# Altium PCB ArcadESP.PcbDoc
Units mil, origin at the board's own origin, x right, y up, seen from the top; angles counter-clockwise.
Board outline 3937.01 x 1968.5 mil, 2 copper layers (Top, Bottom); 118 components, 74 nets, 416 pads, 97 vias.
Unrouted connection lines stored in the file: 4.
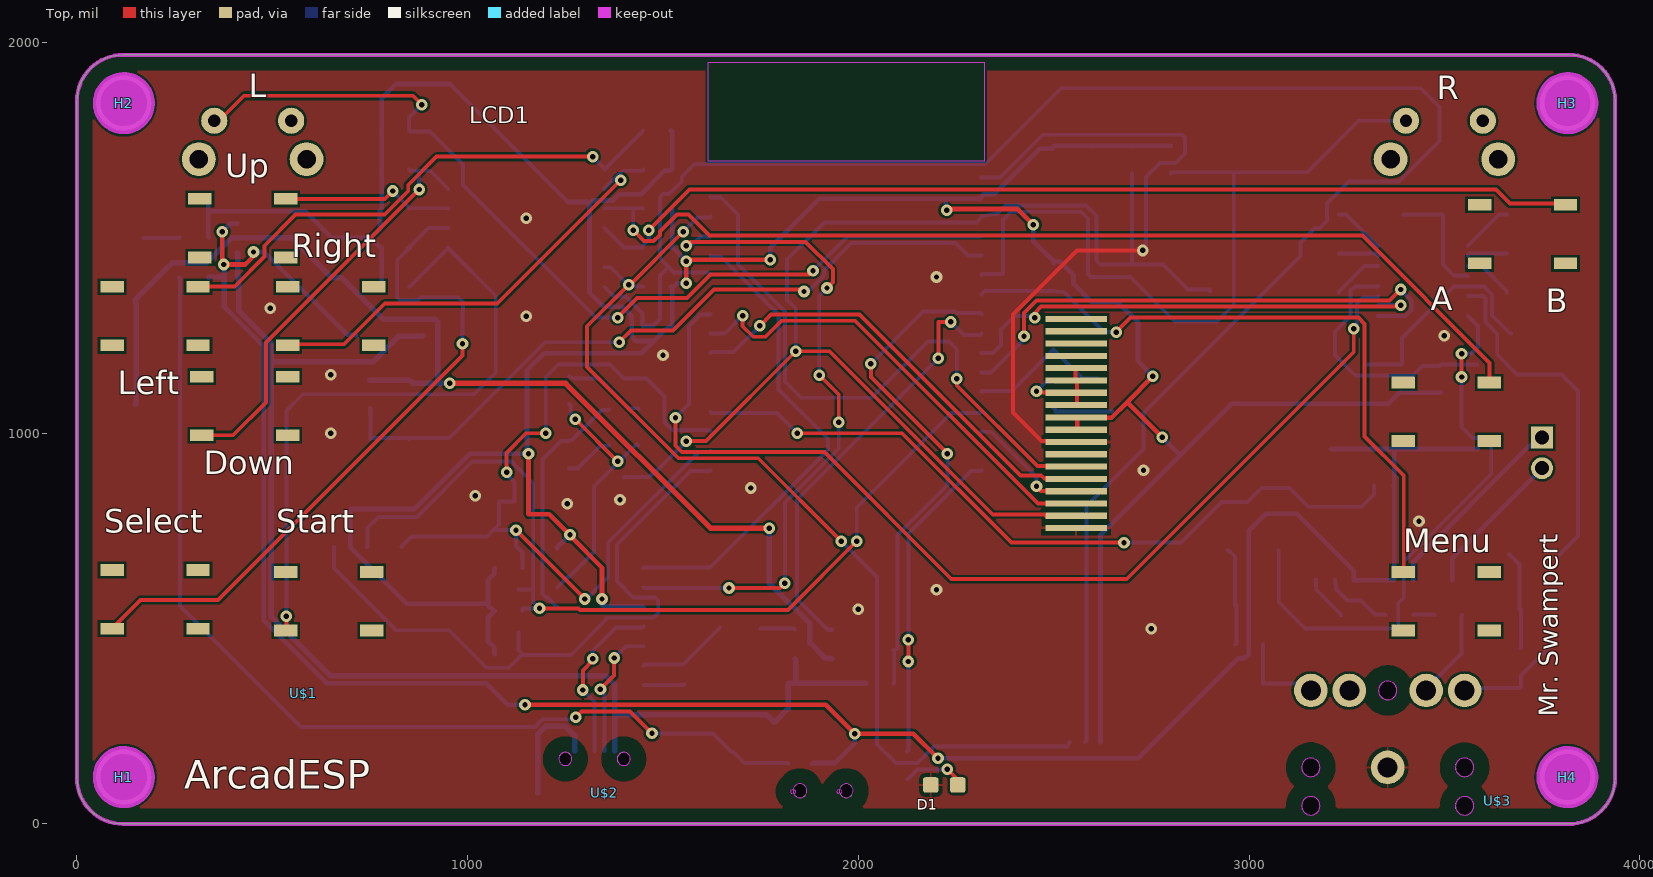
[diagram p0: Top view]
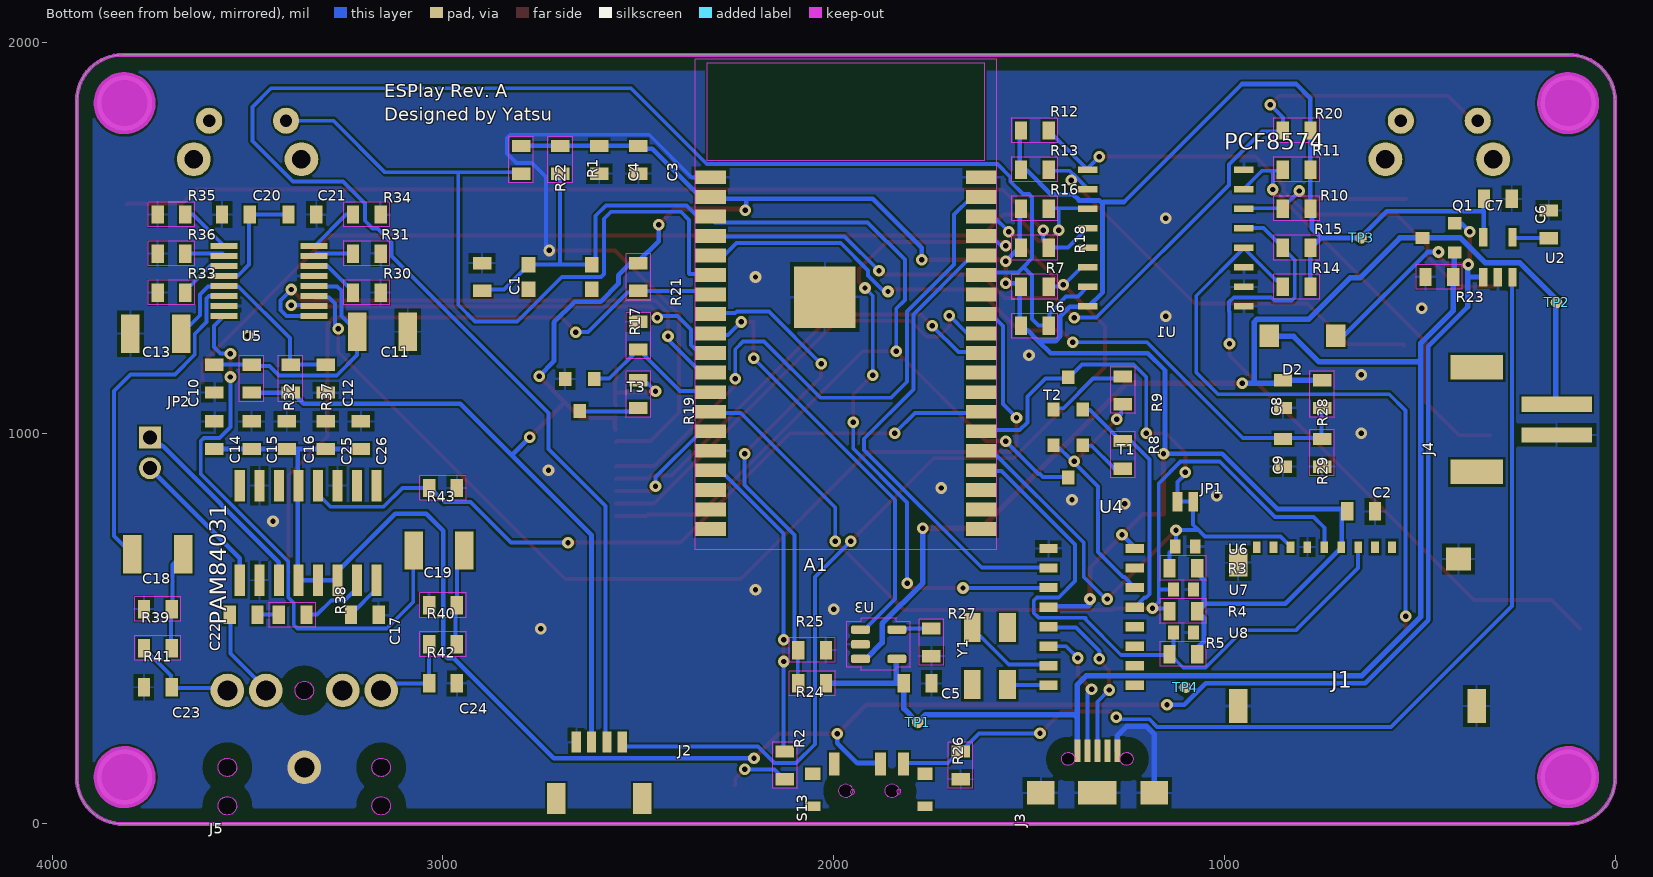
[diagram p1: Bottom view, seen from below]

## Layer stack, top to bottom
Top Solder: solder mask 0.4, Solder Resist, Dk 3.5
Top: signal copper 1.378
Dielectric 1: dielectric 12.6, FR-4, Dk 4.8
Bottom: signal copper 1.378
Bottom Solder: solder mask 0.4, Solder Resist, Dk 3.5

## Board outline
107.82,1968.06 ccw(c118.12,1850.39) 0,1850.39 0,118.11 ccw(c118.11,118.11) 118.11,0 3818.9,0 3829.19,0.45 ccw(c3818.91,118.12) 3936.58,107.81 3937.01,115.79 3937.01,1852.72 3936.46,1862.91 ccw(c3820.06,1851.56) 3818.9,1968.5 118.11,1968.5
cut-out: 3551.85,22.95 ccw(c3551.85,46.57) 3575.47,46.57 ccw(c3551.85,46.57) 3551.85,70.19 ccw(c3551.85,46.57) 3528.23,46.57 ccw(c3551.85,46.57)
cut-out: 3551.85,121.38 ccw(c3551.85,145) 3575.47,145 ccw(c3551.85,145) 3551.85,168.62 ccw(c3551.85,145) 3528.23,145 ccw(c3551.85,145)
cut-out: 3158.15,22.95 ccw(c3158.15,46.57) 3181.77,46.57 ccw(c3158.15,46.57) 3158.15,70.19 ccw(c3158.15,46.57) 3134.53,46.57 ccw(c3158.15,46.57)
cut-out: 3355,318.23 ccw(c3355,341.85) 3378.62,341.85 ccw(c3355,341.85) 3355,365.47 ccw(c3355,341.85) 3331.38,341.85 ccw(c3355,341.85)
cut-out: 3158.15,121.38 ccw(c3158.15,145) 3181.77,145 ccw(c3158.15,145) 3158.15,168.62 ccw(c3158.15,145) 3134.53,145 ccw(c3158.15,145)
cut-out: 1850.94,67.28 ccw(c1850.94,85) 1868.65,85 ccw(c1850.94,85) 1850.94,102.72 ccw(c1850.94,85) 1833.22,85 ccw(c1850.94,85)
cut-out: 1969.06,67.28 ccw(c1969.06,85) 1986.78,85 ccw(c1969.06,85) 1969.06,102.72 ccw(c1969.06,85) 1951.35,85 ccw(c1969.06,85)
cut-out: 1250.2,149.88 ccw(c1250.2,166.61) 1266.93,166.61 ccw(c1250.2,166.61) 1250.2,183.34 ccw(c1250.2,166.61) 1233.47,166.61 ccw(c1250.2,166.61)
cut-out: 1399.8,149.88 ccw(c1399.8,166.61) 1416.53,166.61 ccw(c1399.8,166.61) 1399.8,183.34 ccw(c1399.8,166.61) 1383.07,166.61 ccw(c1399.8,166.61)
cut-out: 3553.18,22.95 3555.82,23.25 ccw(c3551.85,46.58) 3550.52,70.2 ccw(c3551.85,46.58)
cut-out: 3553.18,121.38 3555.82,121.67 ccw(c3551.85,145) 3550.52,168.62 ccw(c3551.85,145)
cut-out: 3159.48,22.95 3162.11,23.25 ccw(c3158.15,46.58) 3156.82,70.2 ccw(c3158.15,46.58)
cut-out: 3356.33,318.23 3358.96,318.53 ccw(c3355,341.85) 3353.67,365.47 ccw(c3355,341.85)
cut-out: 3159.48,121.38 3162.11,121.67 ccw(c3158.15,145) 3156.82,168.62 ccw(c3158.15,145)
cut-out: 1400.9,149.88 1403.07,150.17 ccw(c1399.8,166.62) 1398.7,183.35 ccw(c1399.8,166.62)
cut-out: 1251.3,149.88 1253.47,150.17 ccw(c1250.2,166.62) 1249.1,183.35 ccw(c1250.2,166.62)
cut-out: 1954.64,88.13 1956.71,84.54 1957.01,82.24 1955.93,78.24 1952.34,76.17 1948.34,77.25 1946.27,80.84 1945.97,83.14 1947.05,87.14 1950.64,89.21
cut-out: 1836.53,88.13 1838.6,84.54 1838.9,82.24 1837.82,78.24 1834.23,76.17 1830.23,77.25 1828.16,80.84 1827.86,83.14 1828.94,87.14 1832.53,89.21

## Design rules (kind name [scope] priority, off if disabled: settings)
BoardOutlineClearance mdCopperDimension [All] p1: gap=10 ignorepadtopadclearanceinfootprint=FALSE except(0: Arc-SplitContinuation Track-SplitContinuation SMDPad-SplitContinuation THPad-SplitContinuation Via-SplitContinuation Fill-SplitContinuation Poly-SplitContinuation Region-SplitContinuation Text-SplitContinuation; 40: Poly-OutlineEdge Poly-CavityEdge Poly-CutoutEdge Poly-SplitBarrior)
Clearance "Clearance (Same Net)" [All] p1: gap=6 ignorepadtopadclearanceinfootprint=FALSE
Clearance [All] p2: gap=6 ignorepadtopadclearanceinfootprint=FALSE
HoleSize HoleSize_For_NetClass_3V3 [InNetClass('3V3')] p1: absolutevalues=TRUE maxlimit=0 minlimit=0 maxpercent=80.000 minpercent=20.000
HoleSize HoleSize_For_NetClass_VBUS [InNetClass('VBUS')] p2: absolutevalues=TRUE maxlimit=0 minlimit=0 maxpercent=80.000 minpercent=20.000
HoleSize [All] p3: absolutevalues=TRUE maxlimit=100000 minlimit=13.78 maxpercent=80.000 minpercent=20.000
HoleToHoleClearance mdDrill [All] p1: gap=6 allowstackedmicrovias=TRUE
MinimumSolderMaskSliver [All] p1 off: minsoldermaskwidth=10
PasteMaskExpansion Expansion_SMDPaste_OFF [InPadClass('SMDPaste_OFF')] p1: expansion=0
PasteMaskExpansion mlMinCreamFrame [All] p2: expansion=0
PolygonConnect PolygonConnect_For_PolygonThermal_ON_Width60000_Gap100000 [InPolygonClass('PolygonThermal_ON_Width60000_Gap100000') vs Not IsVia] p1: connectstyle=Relief reliefconductorwidth=6 reliefentries=4 polygonreliefangle="90 Angle" airgapwidth=10
PolygonConnect ThermalVias [IsVia] p2: connectstyle=Direct reliefconductorwidth=10 reliefentries=4 polygonreliefangle="90 Angle" airgapwidth=10
PolygonConnect [All] p3: connectstyle=Relief reliefconductorwidth=10 reliefentries=4 polygonreliefangle="90 Angle" airgapwidth=10
RoutingVias [All] p1: holewidth=13.78 width=29.78 viastyle="Through Hole" minholewidth=13.78 minwidth=29.78 maxholewidth=100 maxwidth=100
SolderMaskExpansion Expansion_SMDSolder_OFF [InPadClass('SMDSolder_OFF')] p1: expansion=0 istentingtop=FALSE
SolderMaskExpansion mlMinStopFrame [All] p2: expansion=4 istentingtop=FALSE
Width Width_For_NetClass_3V3 [InNetClass('3V3')] p1: maxlimit=24 minlimit=10 preferedwidth=12
Width Width_For_NetClass_VBUS [InNetClass('VBUS')] p2: maxlimit=28 minlimit=10 preferedwidth=14
Width [All] p3: maxlimit=10 minlimit=6 preferedwidth=6
26 further rules are at their usual default settings.

## Classes and differential pairs
polygon class PolygonThermal_ON_Width60000_Gap100000: Polygon_1_Net_GND Polygon_2_Net_GND
pad class SMDSolder_OFF: J3-SHIELD1 J3-SHIELD2 J3-SHIELD3
pad class SMDPaste_OFF: A1-39 J3-SHIELD1 J3-SHIELD2 J3-SHIELD3 JP1-1 JP1-2 TP1-P$1 TP2-P$1 TP3-P$1 TP4-P$1
net class 3V3: 3.3V SPK+ SPK- VIN
net class VBUS: V_BATT V_USB

## Components (designator, comment, footprint, x,y, rotation, side; value= is the part's Value field where it differs from the comment)
A1 "ESP32-WROVER-I" XCVR_ESP32-WROVER-I 1968.5,1330 r180 bottom
C1 "100nF" 0805#1 2900,1400 r90 bottom
C2 "10uF" 0805#1 650,800 r180 bottom
C3 "2.2uF" 0805#1 2500,1700 r270 bottom
C4 "100nF" 0805#1 2600,1700 r270 bottom
C5 "" 0805#1 1785,360 r0 bottom
C6 "470pF" 0805#1 170,1535 r90 bottom
C7 "10uF" 0805#1 300,1600 r180 bottom
C8 "100nF" 0805#1 850,1100 r270 bottom
C9 "100nF" 0805#1 850,950 r270 bottom
C10 "" 0805#1 3585,1140 r90 bottom
C11 "47uF" EIA3528 3155,1260 r0 bottom
C12 "" 0805#1 3300,1140 r90 bottom
C13 "47uF" EIA3528 3735,1255 r180 bottom
C14 "" 0805#1 3585,995 r270 bottom
C15 "" 0805#1 3490,995 r270 bottom
C16 "" 0805#1 3400,995 r270 bottom
C17 "" 0805#1 3200,535 r0 bottom
C18 "47uF" EIA3528 3730,690 r0 bottom
C19 "47uF" EIA3528 3010,700 r0 bottom
C20 "" 0805#1 3530,1560 r180 bottom
C21 "" 0805#1 3360,1560 r0 bottom
C22 "" 0805#1 3510,535 r0 bottom
C23 "" 0805#1 3730,350 r180 bottom
C24 "" 0805#1 3000,360 r0 bottom
C25 "" 0805#1 3300,995 r270 bottom
C26 "" 0805#1 3210,995 r270 bottom
D1 "BLUE" LED-0603 2220,100 r180 top
D2 "1A/40V/500mV" SMA-DIODE 800,1250 r180 bottom
H1 "" MICROBUILDER_MOUNTINGHOLE_3.0_PLATEDTHIN 120,120 r0 top
H2 "" MICROBUILDER_MOUNTINGHOLE_3.0_PLATEDTHIN 120,1845 r0 top
H3 "" MICROBUILDER_MOUNTINGHOLE_3.0_PLATEDTHIN 3815,1845 r0 top
H4 "" MICROBUILDER_MOUNTINGHOLE_3.0_PLATEDTHIN 3815,120 r0 top
J1 "MICROSD-PUSH-OUT" MICROSD-PUSH-OUT 950,700 r180 bottom
J2 "" 1X04_1MM_RA 2600,210 r180 bottom
J3 "" USB-B-MICRO-SMD 1325,80 r90 bottom
J4 "" JST-2-SMD 295,1035 r90 bottom
J5 "AUDIO_JACK_3.5MM_PTH" AUDIO-JACK 3355,145 r90 bottom
JP1 "JP Bootstrap" SMT-JUMPER_2_NC_TRACE_NO-SILK 1100,825 r0 bottom
JP2 "" 1X02M 3750,950 r270 bottom
LCD1 "" ILI9341-2.4 2030,1025 r180 top
PAM84031 "PAM8403" SOP-16 3345,745 r180 bottom
Q1 "1.1A/60V/600mΩ" SOT23-3 450,1500 r90 bottom
R1 "10K" 0805#2 2700,1700 r90 bottom
R2 "2K2" 0805#2 2125,150 r90 bottom
R3 "10K" 0805#2 1105,655 r0 bottom
R4 "10K" 0805#2 1105,545 r0 bottom
R5 "10K" 0805#2 1105,435 r0 bottom
R6 "4K7" 0805#2 1485,1275 r180 bottom
R7 "4K7" 0805#2 1485,1375 r180 bottom
R8 "10K" 0805#2 1260,945 r90 bottom
R9 "10K" 0805#2 1260,1110 r270 bottom
R10 "10K" 0805#2 815,1575 r0 bottom
R11 "10K" 0805#2 815,1675 r0 bottom
R12 "10K" 0805#2 1485,1775 r180 bottom
R13 "10K" 0805#2 1485,1675 r180 bottom
R14 "10K" 0805#2 815,1375 r0 bottom
R15 "10K" 0805#2 815,1475 r0 bottom
R16 "10K" 0805#2 1485,1575 r180 bottom
R17 "100K" 0805#2 2500,1250 r90 bottom
R18 "10K" 0805#2 1485,1475 r180 bottom
R19 "10" 0805#2 2500,1100 r270 bottom
R20 "10K" 0805#2 815,1775 r0 bottom
R21 "10K" 0805#2 2500,1400 r270 bottom
R22 "10K" 0805#2 2800,1700 r270 bottom
R23 "10K" 0805#2 450,1400 r180 bottom
R24 "47K" 0805#2 2055,360 r0 bottom
R25 "47K" 0805#2 2055,445 r0 bottom
R26 "100K" 0805#2 1675,150 r90 bottom
R27 "1.65K" 0805#2 1750,465 r90 bottom
R28 "470K" 0805#2 750,1100 r270 bottom
R29 "470K" 0805#2 750,950 r270 bottom
R30 "10K" 0805#2 3195,1360 r0 bottom
R31 "10K" 0805#2 3195,1460 r0 bottom
R32 "1" 0805#2 3490,1140 r270 bottom
R33 "10K" 0805#2 3695,1360 r180 bottom
R34 "10K" 0805#2 3195,1560 r0 bottom
R35 "10K" 0805#2 3695,1560 r180 bottom
R36 "10K" 0805#2 3695,1460 r180 bottom
R37 "1" 0805#2 3390,1140 r270 bottom
R38 "10K" 0805#2 3385,535 r180 bottom
R39 "220K" 0805#2 3730,550 r180 bottom
R40 "220K" 0805#2 3000,560 r180 bottom
R41 "100" 0805#2 3730,450 r0 bottom
R42 "100" 0805#2 3000,460 r0 bottom
R43 "100K" 0805#2 3000,860 r0 bottom
S13 "" SWITCH_SPST_SMD_A 1910,85 r0 bottom
T1 "600mA/40V" SOT23-3 1400,930 r0 bottom
T2 "600mA/40V" SOT23-3 1400,1100 r180 bottom
T3 "600mA/40V" SOT23-3 2650,1100 r0 bottom
TP1 "" PAD.03X.03 1785,260 r180 bottom
TP2 "" PAD.03X.03 150,1335 r180 bottom
TP3 "" PAD.03X.03 650,1500 r180 bottom
TP4 "" PAD.03X.03 1100,350 r180 bottom
U1 "PCF8574" SO16 1150,1500 r0 bottom
U2 "MIC5219 3.3V" SOT23-5 300,1450 r180 bottom
U3 "LTC4054LES5-4.2#TRPBF" SOT95P280X100-5N 1885,460 r180 bottom
U4 "CH340G" SO016 1340,530 r270 bottom
U5 "UDA1334ATS" MICROBUILDER_SSOP16_4.4MM 3445,1390 r90 bottom
U6 "ESD0402" ESD0402 1100,710 r180 bottom
U7 "ESD0402" ESD0402 1104.41,600 r180 bottom
U8 "ESD0402" ESD0402 1104.41,490 r180 bottom
U$1 "" OSHW-LOGO-M 580,335 r0 top
U$2 "" USB_LOGO 1350,80 r180 top
U$3 "" HEADPHONE_LOGO 3635,60 r0 top
Y1 "12Mhz" CRYSTAL-SMD-5X3.2-4PAD 1600,430 r90 bottom
? "R" TACTILE_SWITCH_PTH_RIGHT_ANGLE_KIT 3500,1800 r0 bottom
? "L" TACTILE_SWITCH_PTH_RIGHT_ANGLE_KIT 450,1800 r0 bottom
? "" TACTILE_SWITCH_SMD_5.2MM 3505,570 r0 top
? "" TACTILE_SWITCH_SMD_5.2MM 3700,1510 r180 top
? "" TACTILE_SWITCH_SMD_5.2MM 3505,1055 r180 top
? "" TACTILE_SWITCH_SMD_5.2MM 200,575 r0 top
? "" TACTILE_SWITCH_SMD_5.2MM 645,570 r0 top
? "" TACTILE_SWITCH_SMD_5.2MM 650,1300 r0 top
? "" TACTILE_SWITCH_SMD_5.2MM 200,1300 r180 top
? "" TACTILE_SWITCH_SMD_5.2MM 430,1070 r0 top
? "" TACTILE_SWITCH_SMD_5.2MM 425,1525 r180 top
? "RST" TACTILE_SWITCH_SMD_4.6X2.8MM 2700,1400 r180 bottom

## Footprints (in the part's own frame and the unit in brackets; to place one, negate y for a bottom-side part, rotate by r counter-clockwise, add the part's x,y. Pads: shape width x height; smd on the part's side, far side on the other; paste and mask are expansions set on the pad)
1X02M [mil] "1X02M"
  rect 56x56 / inner round 51.74 / far side rect 56x56 hole 36: 1(-39.37,0)
  round 56 hole 36: 2(39.37,0)
  body extent -65,-28 68,28, height 50
1X04_1MM_RA [mm] "1X04_1MM_RA"
  rect 0.6x1.35 smd: 1(-1.5,0) 2(-0.5,0) 3(0.5,0) 4(1.5,0)
  rect 1.2x2 smd: NC1(2.8,-3.675) NC2(-2.8,-3.675)
  body extent -3.4,-4.68 3.4,0.68, height 1.27
0805#1 [mil] "0805"
  rect 31.5x47.24 smd: 1(-35.43,0) 2(35.43,0)
  body extent -51,-24 51,24, height 50
0805#2 [mil] "0805"
  rect 31.5x47.24 smd: 1(-35.43,0) 2(35.43,0)
  Top keep-out lines w2: -59.06,-31.5 -59.06,31.5 59.06,31.5 59.06,-31.5 -59.06,-31.5
  body extent -60,-33 60,33, height 150
AUDIO-JACK [mil] "AUDIO-JACK"
  round 86 hole 51.18: RING(196.85,196.85) RSH(196.85,98.43) SLEEVE(0,0) TIP(196.85,-196.85) TSH(196.85,-98.43)
  body extent -43,-240 240,240, height 50
CRYSTAL-SMD-5X3.2-4PAD [mil] "CRYSTAL-SMD-5X3.2-4PAD"
  rect 74.8x43.31 smd: 1(-72.83,-45.28) 2(72.83,-45.28) 3(72.83,45.28) 4(-72.83,45.28)
  body extent -110,-67 110,67, height 50
EIA3528 [mm] "EIA3528"
  rect 1.2x2.5 smd: A(1.65,0) C(-1.65,0)
  body extent -2.25,-1.25 2.25,1.25, height 1.27
ESD0402 [mm] "ESD0402"
  rect 0.7x0.9 smd: 1(-0.65,0) 2(0.65,0)
  body extent -1,-0.45 1,0.45, height 1.27
HEADPHONE_LOGO [mil] "HEADPHONE_LOGO"
ILI9341-2.4 [mm] "ILI9341-2.4"
  rect 4x0.4 smd: P$1(-13.4,6.8) P$2(-13.4,6) P$3(-13.4,5.2) P$4(-13.4,4.4) P$5(-13.4,3.6) P$6(-13.4,2.8) P$7(-13.4,2) P$8(-13.4,1.2) P$9(-13.4,0.4) P$10(-13.4,-0.4) P$11(-13.4,-1.2) P$12(-13.4,-2) P$13(-13.4,-2.8) P$14(-13.4,-3.6) P$15(-13.4,-4.4) P$16(-13.4,-5.2) P$17(-13.4,-6) P$18(-13.4,-6.8)
  body extent -15.4,-7 -11.4,7, height 1.27
JST-2-SMD [mm] "JST-2-SMD"
  rect 1x4.6 smd: 1(-1,-3.7) 2(1,-3.7)
  rect 1.6x3.4 smd: NC1(-3.4,1.5) NC2(3.4,1.5)
  body extent -4.2,-6 4.2,3.2, height 1.27
LED-0603 [mm] "LED-0603"
  rrect30% 1x1 smd: A(-0.877,0) C(0.877,0)
  body extent -1.39,-0.54 1.39,0.54, height 3.81
MICROBUILDER_MOUNTINGHOLE_3.0_PLATEDTHIN [mm] "MICROBUILDER_MOUNTINGHOLE_3.0_PLATEDTHIN"
  round 3.6 hole 3: P$1(0,0)
  Top keep-out circle w2.032: c0,0 r1
  Top keep-out circle w2.032: c0,0 r1
  Top keep-out circle w2.032: c0,0 r1
  Bottom keep-out circle w2.032: c0,0 r1
  Bottom keep-out circle w2.032: c0,0 r1
  body extent -2.03,-2.03 2.03,2.03, height 3.81
MICROBUILDER_SSOP16_4.4MM [mm] "MICROBUILDER_SSOP16_4.4MM"
  rect 0.4x1.75 smd: 1(-2.275,-2.92) 2(-1.625,-2.92) 3(-0.975,-2.92) 4(-0.325,-2.92) 5(0.325,-2.92) 6(0.975,-2.92) 7(1.625,-2.92) 8(2.275,-2.92) 9(2.275,2.92) 10(1.625,2.92) 11(0.975,2.92) 12(0.325,2.92) 13(-0.325,2.92) 14(-0.975,2.92) 15(-1.625,2.92) 16(-2.275,2.92)
  body extent -2.48,-3.8 2.48,3.8, height 1.27
MICROSD-PUSH-OUT [mm] "MICROSD-PUSH-OUT"
  rect 0.5x0.75 smd: 1(9.625,0.225) 2(8.525,0.225) 3(7.425,0.225) 4(6.325,0.225) 5(5.225,0.225) 6(4.125,0.225) 7(3.025,0.225) 8(1.925,0.225) CD(0.825,0.225)
  rect 1.2x1.8 smd: G1(-0.375,-0.8)
  rect 1.2x2.2 smd: G2(-0.375,-10.1) G4(15.125,-10.1)
  rect 1.6x1.5 smd: G3(13.95,-0.55)
  body extent -0.97,-11.2 15.72,0.6, height 1.27
OSHW-LOGO-M [mil] "OSHW-LOGO-M"
PAD.03X.03 [mil] "PAD.03X.03"
  rrect100% 30x30 smd paste+0: P$1(0,0)
  body extent -15,-15 15,15, height 50
SMA-DIODE [mil] "SMA-DIODE"
  rect 50x57.87 smd: A(-84.65,0) C(84.65,0)
  body extent -110,-29 110,29, height 50
SMT-JUMPER_2_NC_TRACE_NO-SILK [mil] "SMT-JUMPER_2_NC_TRACE_NO-SILK"
  rect 25x50 smd paste+0: 1(-20,0) 2(20,0)
  Top lines w10: -20,0 20,0
  body extent -32,-25 32,25, height 150
SO16 [mil] "SO16"
  rect 50x16.5 smd: 1(-200,175) 2(-200,125) 3(-200,75) 4(-200,25) 5(-200,-25) 6(-200,-75) 7(-200,-125) 8(-200,-175) 9(200,-175) 10(200,-125) 11(200,-75) 12(200,-25) 13(200,25) 14(200,75) 15(200,125) 16(200,175)
  body extent -225,-183 225,183, height 50
SO016 [mil] "SO016"
  rect 23.62x47.24 smd: 1(-175,-110.24) 2(-125,-110.24) 3(-75,-110.24) 4(-25,-110.24) 5(25,-110.24) 6(75,-110.24) 7(125,-110.24) 8(175,-110.24) 9(175,110.24) 10(125,110.24) 11(75,110.24) 12(25,110.24) 13(-25,110.24) 14(-75,110.24) 15(-125,110.24) 16(-175,110.24)
  body extent -187,-134 187,134, height 50
SOP-16 [mil] "SOP-16"
  rect 26x80 smd: 1(-175,-121) 2(-125,-121) 3(-75,-121) 4(-25,-121) 5(25,-121) 6(75,-121) 7(125,-121) 8(175,-121) 9(175,121) 10(125,121) 11(75,121) 12(25,121) 13(-25,121) 14(-75,121) 15(-125,121) 16(-175,121)
  body extent -188,-161 188,161, height 50
SOT23-3 [mil] "SOT23-3"
  rect 31.5x35.43 smd: 1(-37.4,-39.37) 2(37.4,-39.37) 3(0,43.31)
  body extent -53,-57 53,61, height 50
SOT23-5 [mil] "SOT23-5"
  rect 21.65x47.24 smd: 1(-37.4,-51.19) 2(0,-51.19) 3(37.4,-51.19) 4(37.4,51.19) 5(-37.4,51.19)
  body extent -48,-75 48,75, height 50
SOT95P280X100-5N [mil] "SOT95P280X100-5N"
  rrect50% 48.82x21.65 smd: 1(-46.65,37.4) 2(-46.65,0) 3(-46.65,-37.4) 4(46.65,-37.4) 5(46.65,37.4)
  Top keep-out lines w1.97: 81.1,-58.27 44.49,-58.27 44.49,-66.93 -44.49,-66.93 -44.49,-58.27 -81.1,-58.27 -81.1,58.27 -44.49,58.27 -44.49,66.93 44.49,66.93 44.49,58.27 81.1,58.27 81.1,-58.27
  body extent -82,-68 82,68, height 150
SWITCH_SPST_SMD_A [mm] "SWITCH_SPST_SMD_A"
  rect 0.7x1.5 smd: 1(-2.25,-1.75) 2(-0.75,-1.75) 3(2.25,-1.75)
  rect 1x0.6 smd: GND1(-3.65,1) GND3(3.65,1)
  rect 1x0.8 smd: GND2(-3.65,-1.1) GND4(3.65,-1.1)
  body extent -4.15,-2.5 4.15,1.3, height 1.27
TACTILE_SWITCH_PTH_RIGHT_ANGLE_KIT [mil] "TACTILE_SWITCH_PTH_RIGHT_ANGLE_KIT"
  round 66.93 hole 31.5: 1(-98.43,0) 2(98.43,0)
  round 86.61 hole 47.24: ANCHOR1(-137.8,98.43) ANCHOR2(137.8,98.43)
  body extent -181,-34 181,142, height 150
TACTILE_SWITCH_SMD_4.6X2.8MM [mil] "TACTILE_SWITCH_SMD_4.6X2.8MM"
  rect 35.43x39.37 smd: 1(-80.71,-31.5) 2(80.71,-31.5) 3(80.71,31.5) 4(-80.71,31.5)
  body extent -98,-51 98,51, height 50
TACTILE_SWITCH_SMD_5.2MM [mil] "TACTILE_SWITCH_SMD_5.2MM"
  rect 60x30 smd: 1(-110,75) 2(110,75) 3(-110,-75) 4(110,-75)
  body extent -140,-104 140,104, height 150
USB-B-MICRO-SMD [mm] "USB-B-MICRO-SMD"
  rect 1.45x0.4 smd: D+(2.725,0) D-(2.725,0.65) GND(2.725,-1.3) ID(2.725,-0.65) VBUS(2.725,1.3)
  rect 1.5x1.8 smd paste+0 mask+0: SHIELD1(0,3.685) SHIELD2(0,-3.685)
  rect 1.5x2.5 smd paste+0 mask+0: SHIELD3(0,0)
  body extent -0.85,-4.68 3.45,4.68, height 3.81
USB_LOGO [mil] "USB_LOGO"
XCVR_ESP32-WROVER-I [mm] "XCVR_ESP32-WROVER-I"
  rect 2x0.9 smd: 1(-8.81,8.26) 2(-8.81,6.99) 3(-8.81,5.72) 4(-8.81,4.45) 5(-8.81,3.18) 6(-8.81,1.91) 7(-8.81,0.64) 8(-8.81,-0.63) 9(-8.81,-1.9) 10(-8.81,-3.17) 11(-8.81,-4.44) 12(-8.81,-5.71) 13(-8.81,-6.98) 14(-8.81,-8.25) 15(-8.81,-9.52) 16(-8.81,-10.79) 17(-8.81,-12.06) 18(-8.81,-13.33) 19(-8.81,-14.6) 20(8.81,-14.6) 21(8.81,-13.33) 22(8.81,-12.06) 23(8.81,-10.79) 24(8.81,-9.52) 25(8.81,-8.25) 26(8.81,-6.98) 27(8.81,-5.71) 28(8.81,-4.44) 29(8.81,-3.17) 30(8.81,-1.9) 31(8.81,-0.63) 32(8.81,0.64) 33(8.81,1.91) 34(8.81,3.18) 35(8.81,4.45) 36(8.81,5.72) 37(8.81,6.99) 38(8.81,8.26)
  rect 4x4 smd paste+0: 39(-1.38,0.47)
  Top keep-out region: -9.03,9.331 -9.03,15.7 9,15.7 9,9.331
  Top keep-out region: -9.023,9.324 -9.023,15.7 9,15.7 9,9.324
  Top keep-out lines w0.05: 9.8,-15.95 -9.8,-15.95 -9.8,15.95 9.8,15.95 9.8,-15.95
  Bottom keep-out region: -9.029,9.33 -9.029,15.7 9,15.7 9,9.33
  body extent -9.83,-15.98 9.83,15.98, height 3.81

## Part data
A1: library part ESP32-WROVER-I_A1, "Module: combo; GPIO, I2C x2, I2S x2, SDIO, SPI x3, UART x3; U.FL", PackageName=XCVR_ESP32-WROVER-I
C1 C2 C3 C4 C5 C6 C7 C8 C9 C10 C12 C14 C15 C16 C17 C20 C21 C22 C23 C24 C25 C26: library part 2.2UF-0805-25V-(+80/-20%), PackageName=0805
C11 C13 C18 C19: library part 47UF-POLAR-EIA3528-10V-10%, PackageName=EIA3528
D1: library part LED-BLUE0603, PackageName=LED-0603
D2: library part DIODE-SCHOTTKY-SS14, PackageName=SMA-DIODE
H1 H2 H3 H4: library part "Mounting Hole_H1, H2, H3, H4", "MICROBUILDER_MOUNTINGHOLE3.0THIN", PackageName=MICROBUILDER_MOUNTINGHOLE_3.0_PLATEDTHIN
J1: library part MICROSD-PUSH-OUT_J1, "T-Flash Push-Out Micro SD Card Reader 14.75mm x 14.5mm SMD with external pins", PackageName=MICROSD-PUSH-OUT
J2: library part QWIIC_CONNECTORJS-1MM_J2, "QWIIC_CONNECTORJS-1MM", PackageName=1X04_1MM_RA
J3: library part USB_MICRO-B_FEMALE-SMT_J3, "USB_MICRO-B_FEMALE-SMT_J3", PackageName=USB-B-MICRO-SMD
J4: library part JST_2MM_MALE_J4, "JST_2MM_MALE", PackageName=JST-2-SMD
J5: library part AUDIO_JACK_3.5MM_PTH_J5, PackageName=AUDIO-JACK
JP1: library part "JP Bootstrap_JP1", "JUMPER-SMT_2_NC_TRACE_NO-SILK", PackageName=SMT-JUMPER_2_NC_TRACE_NO-SILK
JP2: library part PINHD-1X2_2.00_JP2, "PINHD-1X2_2.00", PackageName=1X02M
LCD1: library part ILI9341-2.4, PackageName=ILI9341-2.4
PAM84031: library part PAM8403_YES, "Dual channel audio amplifier IC - PAM8403", PackageName=SOP-16
Q1: library part MOSFET_PCH-SI2309DS, PackageName=SOT23-3
R1 R2 R3 R4 R5 R6 R7 R8 R9 R10 R11 R12 R13 R14 R15 R16 R17 R18 R19 R20 R21 R22 R23 R24 R25 R26 R28 R29: library part 0.22OHM-0805-1/4W-1%, PackageName=0805
R27 R30 R31 R32 R33 R34 R35 R36 R37 R38 R39 R40 R42 R43: library part 0.3OHM-0805-1/8W-1%, PackageName=0805
R41: library part 0805, PackageName=0805
S13: library part SWITCH-SPDT-SMD-RIGHT-ANGLE_1, PackageName=SWITCH_SPST_SMD_A
T1 T2 T3: library part TRANS_NPN-MMBT2222AL, PackageName=SOT23-3
TP1 TP2 TP3 TP4: library part "TEST-POINT3_TP1, TP2, TP3, TP4", "PAD.03X.03", PackageName=PAD.03X.03
U1: library part PCF8574_U1, "8 100kHz I2C SO-16-300mil I/O Expanders ROHS", PackageName=SO16
U2: library part V_REG_MIC52195V, PackageName=SOT23-5
U3: library part LTC4054LES5-4.2#TRPBF_U3, "LTC4054LES5-4.2#TRPBF*?", PackageName=SOT95P280X100-5N
U4: library part CH340GSMD_U4, "CH340GSMD_SO016", PackageName=SO016
U5: library part UDA1334_U5, "MICROBUILDER_AUDIO_I2S_UDA1334\"\"", PackageName=MICROBUILDER_SSOP16_4.4MM
U6 U7 U8: library part "ESD0402_U6, U7, U8", PackageName=ESD0402
U$1: library part OSHW-LOGO-M, PackageName=OSHW-LOGO-M
U$2: library part USB_LOGO, PackageName=USB_LOGO
U$3: library part HEADPHONE_LOGO, PackageName=HEADPHONE_LOGO
Y1: library part CRYSTALSMD_Y1, "CRYSTALSMD-5X3.2-4PAD", PackageName=CRYSTAL-SMD-5X3.2-4PAD
? ?: library part TACTILE_SWITCH_PTH_RIGHT_ANGLE_KIT, PackageName=TACTILE_SWITCH_PTH_RIGHT_ANGLE_KIT
? ? ? ? ? ? ? ? ?: library part TACTILE_SWITCH_SMD_5.2MM, PackageName=TACTILE_SWITCH_SMD_5.2MM
?: library part TACTILE_SWITCH_SMD_4.6X2.8MM, PackageName=TACTILE_SWITCH_SMD_4.6X2.8MM

## Free pads (board coordinates)
  round 33.46 hole 33.46 unplated: MH1(1399.8,166.61) MH2(1250.2,166.61) MH8(1399.8,166.61) MH9(1250.2,166.61)
  round 35.43 hole 35.43 unplated: MH1(1850.94,85) MH2(1969.06,85) MH6(1969.06,85) MH7(1850.94,85)
  round 47.24 hole 47.24 unplated: MH1(3551.85,145) MH1(3551.85,145) MH2(3551.85,46.57) MH2(3551.85,46.57) MH3(3158.15,46.57) MH3(3158.15,46.57) MH4(3158.15,145) MH4(3158.15,145) MH5(3355,341.85) MH5(3355,341.85)

## Via types
v1: diameter 29.78/29.78 (per signal layer), hole 13.78, Top to Bottom, 97 vias

## Nets (pads, with @x,y where several pads share a name; then routed paths per layer and width w, separated by ;. In a path a pad name is that pad's centre, name@x,y a point inside that pad or via, vN(x,y) a via of type N, cw(c..) or ccw(c..) an arc to the next point about the centre after c; other vN are vias at no path point)
3.3V: A1.2 C2.1 C3.1 C4.1 C7.1 J1.4 J2.2 LCD1.P$9 LCD1.P$10 R1.2 R3.1 R4.1 R5.1 R6.1 R7.1 R10.1 R11.1 R12.1 R13.1 R14.1 R15.1 R16.1 R18.1 R20.1 R21.1 R22.1 R32.2 R37.2 TP3.P$1 U1.16 U2.5 U4.4 U4.16 | length 9726.1
  Top w12: v1(1156,948) 1156,793 1209,793 v1(1262,740) 1264,736 1344,656 v1(1344,576) ; v1(1560,1384) v1(1560,1440) 1564,1444 v1(1775,1444) ; v1(2226,1571) 2229,1574 2408,1574 v1(2448,1534) ; LCD1.P$9 2560,1012 2560,1036 LCD1.P$10 2560,1040 2648,1040 2688,1080 ; v1(2754,1146) 2688,1080 ; v1(2778,990) 2688,1080
  Bottom w12: C7.1 336,1600 336,1568 ; U2.5 336,1504 336,1568 ; C2.1 688,800 C2.1@700,788 ; R14.1 780,1376 780,1472 R15.1 776,1476 752,1500 ; R5.1 1068,436 1068,452 1052,468 1052,528 1068,544 R4.1 1064,548 1052,560 1052,564 ; R3.1 1068,652 1068,640 1052,624 1052,564 ; U4.16 1228.74,706.74 v1(1262,740) ; v1(1344,576) 1344,560 1347,557 1448.24,557 U4.4 ; R16.1 1524,1572 1524,1476 R18.1 1528,1472 v1(1560,1440) ; R12.1 1524,1772 1524,1676 R13.1 1516,1672 1504,1672 1444,1612 1388,1612 1372,1596 1320,1596 1312,1588 ; v1(1560,1384) 1536,1384 1528,1376 R7.1 1524,1372 1524,1276 R6.1 1503.63,1263.63 1476,1236 ; v1(1775,1444) 1775,1475 1900,1600 2224,1600 ; v1(2226,1571) 2224,1572 2224,1600 ; v1(2448,1534) 2448,1492 R21.1@2500,1440 ; R21.1 R21.1@2500,1440 ; J2.2 2620,212 2620,740 2824,944 ; v1(2754,1146) 2716,1184 2716,1284 2663.18,1336.82 2596.6,1336.82 2551,1382.42 2551,1404 2515,1440 R21.1@2500,1440 ; v1(2778,990) 2824,944 ; R22.1 2800,1736 2704,1736 R1.2 2700,1736 2604,1736 C4.1 2600,1736 2500,1736 C3.1 2496,1728 2464,1728 2348,1612 2320,1612 A1.2 2312,1600 2224,1600 ; R32.2 3488,1104 3392,1104 R37.2 3384,1104 3356,1076 2956,1076 2824,944 ; 336,1568 584,1568 648,1504 TP3.P$1 752,1500 ; C2.1@700,788 700,712 J1.4 704,704 844,564 1052,564 ; C2.1@700,788 700,806 864,806 1006,948 v1(1156,948) 1152,952 1152,1161 1196,1205 1445,1205 1476,1236 ; 752,1500 776,1524 776,1572 R10.1 780,1580 780,1672 R11.1 780,1680 780,1772 R20.1 780,1780 780,1858 816,1894 955,1894 1257,1592 1308,1592 1312,1588 ; 1312,1588 1312,1360 1348,1324 U1.16 1352,1324 1396,1324 1420,1300 1420,1248 1432,1236 1476,1236
A: R16.2 U1.11 | length 2600.2
  Top w10: v1(1424,1520) 1452,1492 1476,1492 1492,1508 1492,1516 1536,1560 1565,1560 1619,1506 3290,1506 3616,1180 3616,1132 3615,1130
  Bottom w10: U1.11 1352,1576 1424,1576 ; v1(1424,1520) 1424,1576 ; R16.2 1448,1576 1424,1576
AUDIO_SHDN: A1.26 PAM84031.12 R43.2 | length 1950.6
  Top w10: v1(1844,1000) 2112,1000 2392,720 v1(2680,720)
  Bottom w10: A1.26 1624,1052 1792,1052 v1(1844,1000) ; v1(2680,720) 2826,720 2930,824 2996,824 3032,860 R43.2 3104,860 3152,812 3288,812 3320,844 PAM84031.12
B: R18.2 U1.12 | length 2577.4
  Top w10: v1(1464,1520) 1568,1624 3632,1624 3668,1588 3808,1588 3810,1585
  Bottom w10: U1.12 1352,1524 1400,1476 1448,1476 R18.2 1448,1480 1464,1496 v1(1464,1520)
CHRG_STAT: A1.9 U3.1 | length 1105.4
  Top w10: v1(2205,1192) 2205,1285 v1(2237,1285)
  Bottom w10: U3.1@1921.65,497.4 1843,576.06 1843,830 v1(2205,1192) ; v1(2237,1285) 2270,1252 2312,1252 A1.9
  Bottom w12: U3.1@1921.65,497.4 U3.1
D+: J3.D+ U4.5 | length 434
  Top w10: v1(1295,343) 1295,393 1320,418 v1(1320,423)
  Bottom w10: v1(1295,343) 1325,313 J3.D+ ; v1(1320,423) 1320,443 1380,503 1445.76,503 U4.5
D-: J3.D- U4.6 | length 344.3
  Top w10: v1(1340,345) 1375,380 v1(1375,425)
  Bottom w10: v1(1340,345) 1350.59,334.41 J3.D- ; v1(1375,425) 1405,455 U4.6
DOWN: R11.2 U1.7 | length 1075.4
  Top w10: 320,995 400,995 484,1079 484,1232 v1(876,1624)
  Bottom w10: R11.2 852,1672 876,1672 ; v1(876,1624) 876,1672 ; U1.7 948,1628 904,1672 876,1672
DTR: R8.2 T2.2 U4.13 | length 618.8
  Bottom w10: U4.13 1228,556 1204,580 1200,580 1192,588 1192,933 1239.43,980.43 R8.2 1268,984 1344,1060 1360,1060 T2.2
GND: A1.1 A1.15 A1.38 A1.39 C1.2 C2.2 C3.2 C4.2 C5.1 C6.2 C7.2 C8.2 C9.2 C10.1 C11.C C12.1 C13.C C14.1 C15.1 C16.1 C17.1 C20.1 C21.1 C23.1 C24.1 C25.1 C26.1 D1.C J1.6 J1.G1 J1.G2 J1.G3 J1.G4 J2.1 J3.GND J3.SHIELD1 J3.SHIELD2 J3.SHIELD3 J4.1 J5.SLEEVE LCD1.P$1 LCD1.P$8 PAM84031.2 PAM84031.11 PAM84031.15 R17.2 R23.1 R25.1 R26.1 R27.1 R29.2 R30.1 R31.1 R33.1 R34.1 R35.1 R36.1 R39.1 R40.1 R43.1 T3.2 TP4.P$1 U1.1 U1.2 U1.3 U1.8 U2.2 U3.2 U4.1 U5.5 U5.15 U6.2 U7.2 U8.2 | length 2070
  Top w10: LCD1.P$8 2556,980 2469,980 2396,1053 2396,1304 2560,1468 v1(2728,1468)
  Bottom w10: A1.1 2363.2,1655.2 2472,1764 2828,1764 2836,1756 2836,1716 2812,1692 2772,1692 2736,1656 2736,1476 v1(2728,1468)
  Bottom w14: J3.SHIELD2 1179.92,229.92 1200,250 1250,250 1273.82,226.18 J3.GND
  other v1: 2750,500 2000,550 2200,600 3435,775 1255,820 1390,830 1020,840 1725,860 2730,905 650,1000 650,1150 1500,1200 3500,1250 1150,1300 495,1320 2200,1400 1150,1550
I2C_SCL: A1.36 J2.4 R7.2 U1.14 | length 2594.6
  Top w10: v1(1552,1516) 1416,1380 v1(1412,1380) 1306,1274 1306,1170 1540,936 1744,936 v1(1956,724)
  Bottom w10: U1.14 1366,1425 v1@1415,1376 ; v1(1412,1380) 1412,1376 v1@1415,1376 ; R7.2 1448,1376 v1@1415,1376 ; v1(1552,1516) 1588,1552 1620,1552 A1.36 ; v1(1956,724) 2048,632 2048,204 2096,156 2152,156 2194,198 2535.28,198 J2.4
I2C_SDA: A1.33 J2.3 R6.2 U1.15 | length 4878.7
  Bottom w10: U1.15 1375,1350 1405,1350 1448,1307 R6.2@1448,1276 ; R6.2 R6.2@1448,1276 ; A1.33 1620,1408 1616,1412 1528,1412 1514,1426 ; J2.3 2584,212 2584,814 2730,960 2730,1052 3132,1454 3132,1488 3168,1524 3180,1524 3200,1544 3200,1588 3256,1644 3384,1644 3488,1748 3488,1835 3440,1883 2519,1883 2325,1689 1581,1689 1548,1656 1548,1644 1516,1612 1500,1612 1492,1604 1492,1448 1514,1426 ; R6.2@1448,1276 1476,1276 1492,1292 1492,1404 1514,1426
I2S_BCK: A1.11 U5.1 | length 1356.9
  Top w10: v1(2424,1248) 2424,1308 2456,1340 3360,1340 v1(3388,1368)
  Bottom w10: A1.11 2316,1156 2340,1156 2424,1240 v1(2424,1248) ; U5.1 3332,1300 3400,1300 3416,1316 3416,1340 v1(3388,1368)
I2S_DIN: A1.31 U5.3 | length 2696.5
  Top w10: v1(1532,1040) 1532,968 1548,952 1913,952 2238,627 2687,627 3268,1208 v1(3268,1268)
  Bottom w10: v1(1532,1040) 1567,1075 1567,1275 1596,1304 1620,1304 A1.31 ; v1(3268,1268) 3276,1276 3276,1332 3292,1348 3328,1348 U5.3
I2S_LCK: A1.10 U5.2 | length 1215.8
  Top w10: v1(2452,1296) 2452,1308 2468,1324 3384,1324 v1(3388,1328)
  Bottom w10: A1.10 2344.8,1205.2 2365.72,1226.11 2365.72,1265.72 2400,1300 2448,1300 v1(2452,1296) ; U5.2 3332,1328 v1(3388,1328)
IO0: A1.25 JP1.2 T2.3 | length 943.5
  Top w10: v1(1100,900) 1100,950 1150,1000 v1(1200,1000)
  Bottom w10: v1(1100,900) 1100,895 1120,875 JP1.2 ; v1(1200,1000) 1200,1144 1232,1176 1364,1176 1396,1144 T2.3 1400,1140 1458,1140 1504,1094 1504,1028 1524,1008 1616,1008 A1.25
L_BTN: A1.4 R20.2 | length 2427.7
  Top w10: 351.57,1800 364,1800 428,1864 860,1864 v1(883,1841) ; v1(1384,1296) 1434,1346 1562,1346 1622,1406 1874,1406 v1(1884,1416)
  Bottom w10: v1(883,1841) 850.43,1808.43 R20.2 852,1772 904,1772 988,1688 988,1636 1328,1296 v1(1384,1296) ; v1(1884,1416) 1972,1504 2312,1504 A1.4
LCD_BCKL: A1.12 R17.1 T3.1 | length 374.8
  Bottom w10: A1.12 2316,1108 2393.43,1108 R17.1 2574.57,1140 2612,1140 T3.1
LCD_CS: A1.29 LCD1.P$5 | length 1151.1
  Top w10: v1(1748,1275) 1777,1304 2003,1304 2415,892 2468,892 2476,884 2556,884 LCD1.P$5
  Bottom w10: A1.29 1624,1208 1681,1208 v1(1748,1275)
LCD_DC: A1.14 LCD1.P$4 | length 320
  Top w10: v1(2456,864) 2468,852 2556,852 LCD1.P$4
  Bottom w10: A1.14 2316,1004 2340,1004 2456,888 v1(2456,864)
LCD_MOSI: A1.37 LCD1.P$6 | length 1575.4
  Top w10: v1(2252,1140) 2252,1122.67 2458.67,916 2556,916 LCD1.P$6
  Bottom w10: A1.37 1624,1604 1648,1604 1692,1560 1692,1432 1812,1312 1812,1132 1853,1091 2034,1091 2178,1235 2232,1235 2252,1215 v1(2252,1140)
LCD_SCK: A1.30 LCD1.P$3 | length 1203.9
  Top w10: v1(1704,1301) 1704,1274 1731,1247 1762,1247 1803,1288 1992,1288 2460,820 2556,820 LCD1.P$3
  Bottom w10: A1.30 1658.2,1255.2 v1(1704,1301)
LDAC: C23.2 J5.RING R41.2 | length 274.7
  Bottom w10: J5.RING 3556,344 3560,348 3692,348 C23.2 3696,352 3696,380 3764,448 R41.2
LEFT: R12.2 U1.9 | length 1360.2
  Top w10: 310,1375 312,1376 404,1376 480,1452 480,1480 560,1560 788,1560 848,1620 848,1636 920,1708 v1(1320,1708)
  Bottom w10: v1(1320,1708) U1.9@1352,1676 ; U1.9 U1.9@1352,1676 ; R12.2 1448,1772 U1.9@1352,1676
MENU: A1.7 R21.2 | length 1725.8
  Top w10: v1(2660,1259) 2697,1296 3280,1296 3296,1280 3296,992 3396,892 3396,648 3395,645
  Bottom w10: A1.7 2316,1356 2324,1364 2500,1364 R21.2 2527.3,1360.7 2629,1259 v1(2660,1259)
N$1: A1.16 R2.2 | length 813.8
  Top w10: v1(2128,416) v1(2128,472)
  Bottom w10: R2.2 2128,188 v1(2128,416) ; v1(2128,472) 2128,744 2288,904 2312,904 A1.16
N$2: R27.2 U3.5 | length 89.6
  Bottom w10: R27.2 1752,500 1836,500 U3.5
N$3: D1.A R2.1 | length 165.7
  Top w10: v1(2228,140) 2252,116 2252,100 D1.A
  Bottom w10: R2.1 2128,116 2152,140 v1(2228,140)
N$4: U4.7 Y1.3 | length 236.7
  Bottom w10: U4.7 1452,408 1552,408 1644,500 Y1.3
N$5: C18.A U5.14 | length 887.2
  Bottom w10: U5.14 3598.39,1351.61 3605.41,1344.59 3605.41,1284.59 3635.42,1254.58 3635.42,1201.23 3686,1150.65 3686,1150 3800,1150 3842,1108 3842,737.04 C18.A
N$6: U4.8 Y1.1 | length 105
  Bottom w10: U4.8 1452,356 1552,356 Y1.1
N$7: R26.2 S13.1 U2.3 | length 2598.8
  Top w10: v1(1277,273) 1292,288 1416,288 v1(1472,232)
  Bottom w10: U2.3 264,1396 264,558 574,248 1172,248 1192,268 1272,268 v1(1277,273) ; v1(1472,232) 1628,232 1672,188 R26.2 1680,184 1708,156 1820,156 S13.1
N$9: R19.2 T3.3 | length 156.3
  Bottom w10: R19.2 2504,1060.57 2504,1056 2648,1056 T3.3
N$10: C6.1 U2.4 | length 92.9
  Bottom w10: C6.1 172,1500 260,1500 U2.4
N$11: LCD1.P$11 LCD1.P$12 LCD1.P$13 LCD1.P$14 R19.1 | length 258.7
  Top w10: v1(2456,1108) 2460,1104 2556,1104 LCD1.P$12 ; LCD1.P$11 2560,1076 2560,1100 LCD1.P$12 ; LCD1.P$14 2556,1164 2556,1140 LCD1.P$13 2560,1132 2560,1108 LCD1.P$12
  Bottom w10: v1(2456,1108) 2480,1132 2500,1132 R19.1
N$12: R8.1 T1.1 | length 127.5
  Bottom w10: R8.1 1282.57,909.57 1284,912 1340,968 1360,968 T1.1
N$13: R9.1 T2.1 | length 212.3
  Bottom w10: R9.1 1272,1140 1336,1140 1412,1064 1436,1064 T2.1
N$14: C19.A U5.16 | length 1457.2
  Top w10: v1(3544,1144) v1(3544,1204)
  Bottom w10: C19.A 3076,696 3076,568 3144,500 3372,500 3382,510 3382,566 3396,580 3396,672 3620,896 3620,980 3612,988 3572,988 3544,1016 v1(3544,1144) ; v1(3544,1204) 3569,1204 3586,1221 3586,1274.39 U5.16
N$16: C17.2 PAM84031.8 | length 141
  Bottom w10: C17.2 3232,540 PAM84031.8@3172,600 ; PAM84031.8@3172,600 PAM84031.8 3172,624 PAM84031.8@3172,600
N$17: PAM84031.7 R38.2 | length 176.5
  Bottom w10: PAM84031.7 3224,600 3252,572 3286,572 3322,536 3344,536 R38.2
N$18: C18.C R39.2 R41.1 | length 253.7
  Bottom w10: C18.C 3668,688 3692,664 3692,552 R39.2 3696,548 3696,452 R41.1
N$19: C19.C R40.2 R42.1 | length 256.5
  Bottom w10: C19.C 2948,700 2964,684 2964,564 R40.2 2968,560 2968,460 R42.1
N$20: C12.2 C13.A R37.1 U5.13 | length 574.7
  Bottom w10: C12.2 3300,1176 3388,1176 R37.1 3392,1180 3392,1244 3524,1376 3556,1376 U5.13 3560,1376 3601,1376 3622,1355 3622,1302 3668,1256 C13.A
N$21: C20.2 C21.2 U5.12 | length 303.1
  Bottom w10: C21.2 C20.2 3496,1556 3496,1432 3524,1404 3556,1404 U5.12
N$22: C10.2 C11.A R32.1 U5.4 | length 655.2
  Bottom w10: C11.A 3220,1256 3220,1200 3272,1148 3420,1148 3444,1172 3488,1172 R32.1 3492,1176 3584,1176 C10.2 ; C11.A 3260,1300 3260,1365 3271,1376 3328,1376 U5.4
N$23: C22.1 R38.1 | length 54.4
  Bottom w10: R38.1 3424,536 3468,536 C22.1
N$24: R30.2 U5.6 | length 129.2
  Bottom w10: R30.2 3230.43,1362.43 3296,1428 3328,1428 U5.6
N$25: R31.2 U5.7 | length 102.1
  Bottom w10: R31.2 3324,1460 3328,1456 U5.7
N$26: R33.2 U5.11 | length 130.7
  Bottom w10: U5.11 3560,1428 3596,1428 3659.57,1364.43 R33.2
N$27: R34.2 U5.8 | length 132.8
  Bottom w10: R34.2 3248,1560 3328,1480 U5.8
N$28: R35.2 U5.9 | length 133.1
  Bottom w10: U5.9 3560,1480 3640,1560 R35.2
N$29: R36.2 U5.10 | length 103.2
  Bottom w10: U5.10 3560,1456 3564,1460 R36.2
N$30: C22.2 J5.RSH | length 230.3
  Bottom w10: J5.RSH 3456,348 3544,436 3544,528 C22.2
N$33: U1.13
R_BTN: A1.6 R22.2 | length 2009.5
  Bottom w10: A1.6 2316,1408 2369,1408 2370,1409 2370,1546 2391,1567 2570,1567 2588,1549 2588,1408 2596,1400 2696,1400 2810,1286 2918,1286 2961,1329 2961,1668 ; R22.2 2800,1668 2961,1668 ; 3401.57,1800 3280,1800 3148,1668 2961,1668
RDAC: C24.2 J5.TIP R42.2 | length 230.9
  Bottom w10: R42.2 3036,460 3036,360 C24.2 3136,360 3152,344 J5.TIP
RESET: A1.3 C1.1 LCD1.P$2 R1.1 T1.3 | length 3242.4
  Top w10: v1(1560,980) 1610,980 v1(1840,1210) 1926,1210 2344,792 2476,792 2480,788 2556,788 LCD1.P$2
  Bottom w10: T1.3 1400,888 1464,888 1472,896 1476,896 v1(1560,980) ; v1(1840,1210) 1840,1319 1818,1341 1818,1445 1913,1540 2304,1540 A1.3 2356.26,1562.26 2377,1583 2583,1583 2609.29,1556.71 2609.29,1441.5 2619.29,1431.5 2620,1432 2700,1432 ; R1.1 2700,1432 ; C1.1 2900,1368 2844,1368 2784,1428 2780.71,1431.5 2780,1432 2700,1432
RIGHT: R13.2 U1.10 | length 1164.3
  Top w10: 540,1225 540,1228 684,1228 788,1332 1076,1332 v1(1392,1648)
  Bottom w10: U1.10 1352,1628 v1@1382,1658 ; v1(1392,1648) v1@1382,1658 ; R13.2 1448,1672 1396,1672 v1@1382,1658
RTS: R9.2 T1.2 U4.14 | length 660.2
  Top w10: v1(1276,1036) v1(1384,928)
  Bottom w10: U4.14 1232,608 1256,632 1260,632 1324,696 1324,864 v1@1386,926 ; R9.2 1264,1072 1264,1048 v1(1276,1036) ; v1(1384,928) v1@1386,926 ; T1.2 1432,972 v1@1386,926
RX: A1.35 U4.3 | length 1743.5
  Top w10: v1(1560,1480) 1570,1490 1865,1490 1935,1420 1935,1387 v1(1920,1372) ; v1(1669,604) 1800,604 v1(1812,616) ; v1(1900,1149) 1950,1099 v1(1950,1028)
  Bottom w10: U4.3 1452,604 v1(1669,604) ; v1(1560,1480) 1572,1480 1596,1504 1620,1504 A1.35 ; v1(1812,616) 1812,823 1950,961 v1(1950,1028) ; v1(1900,1149) 1900,1352 v1(1920,1372)
SD_CLK: A1.13 J1.5 R4.2 U7.1 | length 2375.9
  Top w10: v1(1184,552) 1284,552 1288,548 1820,548 v1(1996,724)
  Bottom w10: J1.5 744.29,758.29 772,786 870,786 1012,928 1112,928 1168,872 1168,600 ; U7.1 1168,600 ; R4.2 1140,545.43 1140,552 v1(1184,552) 1168,568 1168,600 ; v1(1996,724) 1996,810 2238,1052 2312,1052 A1.13
SD_CMD: A1.23 J1.3 R5.2 U8.1 | length 1682.1
  Bottom w10: J1.3 657.68,655.32 813,500 816,496 952,496 1048,400 1105.43,400 R5.2 ; U8.1 1130.43,489.57 1130.43,445 R5.2 ; A1.23 1620,904 1571,904 1382,715 1382,622 1424,580 1480,580 1488,572 1488,540 1476,528 1356,528 1356,524 1264,432 1263.81,432.19 1143.24,432.19 R5.2
SD_DAT0: A1.24 J1.7 JP1.1 R3.2 U6.1 | length 1282.1
  Top w10: v1(1124,752) v1(1300,576)
  Bottom w10: J1.7 832,712 856,736 1050,736 1066,752 ; JP1.1 1080,766 1066,752 ; R3.2 1140.43,695.16 U6.1 1128,708 1124,712 v1(1124,752) 1066,752 ; v1(1300,576) 1302,574 1360,632 1360,720 1592,952 1620,952 A1.24
SELECT: R15.2 U1.5 | length 1763.4
  Top w10: 90,500 163.23,573.23 361.23,573.23 987,1199 v1(987,1229)
  Bottom w10: R15.2@848,1472 820,1444 820,1348 828,1340 872,1340 880,1348 976,1348 988,1336 988,1312 987,1311 v1(987,1229) ; R15.2 900.43,1525 U1.5
  Bottom w14: R15.2@848,1472 850.43,1474.43 R15.2
SPK+: JP2.2 PAM84031.1 | length 381.7
  Bottom w12: PAM84031.1 3520,680 3748,908 JP2.2
SPK-: JP2.1 PAM84031.3 | length 505.9
  Bottom w12: PAM84031.3 3420,670 3716.25,966.25 JP2.1
START: R14.2 U1.4 | length 1650.5
  Top w10: 535,495 536,496 v1(536,532)
  Bottom w10: v1(536,532) 536,1058 578,1100 1016,1100 1072,1156 1072,1352 952,1472 U1.4 948,1472 852,1376 R14.2
TX: A1.34 U4.2 | length 1233.2
  Bottom w10: U4.2 1452,656 1621,656 1922,957 1922,986 1796,1112 1796,1304 1648,1452 1624,1452 A1.34
UP: R10.2 U1.6 | length 443.6
  Top w10: 535,1600 788,1600 v1(808,1620)
  Bottom w10: v1(808,1620) R10.2@852,1576 ; R10.2 R10.2@852,1576 ; U1.6 948,1576 R10.2@852,1576
USB_DET: A1.8 R24.2 R25.2 | length 1303.2
  Top w10: v1(2032,1178) 2032,1144 v1(2228,948)
  Bottom w10: v1(2032,1178) 2166,1312 2248,1312 2252,1308 2312,1308 A1.8 ; R24.2 2092,360 2092,444 R25.2 2100,448 2100,740 2228,868 v1(2228,948)
V_BATT: C8.1 J4.2 Q1.3 R28.1 TP2.P$1 U3.3 | length 2942.8
  Top w14: v1(954,1128) 1251,1128 1622,757 v1(1772,757)
  Bottom w14: J4.2 152,1076 152,1332 TP2.P$1 148,1340 244,1436 332,1436 396,1500 Q1.3 551,1500 653,1398 678,1398 784,1292 916,1292 924,1284 924,1128 ; R28.1 752,1136 848,1136 C8.1 856,1132 860,1128 924,1128 ; v1(954,1128) 924,1128 ; v1(1772,757) 1772,616.56 1876,512.56 1876,464 1916,424 1928,424 U3.3
V_USB: C5.2 D2.A J3.VBUS Q1.1 R23.2 R24.1 TP1.P$1 U3.4 | length 3395.4
  Bottom w14: Q1.1 412,1460 412,1400 R23.2 414.57,1313.45 497,1231.02 497,1185 499.5,1187.5 ; D2.A 884,1248 823,1248 757.5,1182.5 505,1182.5 500,1187.5 499.5,1187.5 ; U3.4 1840,420 1840,360 ; R24.1 1840,360 ; 499.5,1187.5 497,1187.5 497,531 648,380 1353,380 1376.18,356.82 J3.VBUS 1376.18,271.18 1385,280 1765,280 TP1.P$1 1820.43,295.43 C5.2 1840,360
VBAT_S: A1.5 C9.1 R28.2 R29.1 | length 1881.3
  Top w10: v1(1388,1233) 1418,1263 1526,1263 1631,1368 1856,1368 v1(1861,1363)
  Bottom w10: R28.2 752,1064 752,988 R29.1 756,988 848,988 C9.1 852,988 953,988 1198,1233 v1(1388,1233) ; v1(1861,1363) 1871,1363 1912,1404 1912,1417 1982,1487 2248.55,1487 2280.35,1455.2 A1.5
VIN: C14.2 C15.2 C16.2 C25.2 C26.2 D2.C PAM84031.4 PAM84031.5 PAM84031.6 PAM84031.13 Q1.2 S13.2 U2.1 | length 6010.4
  Top w12: v1(372,1516) 372,1436 v1(376,1432) 431,1432 452,1453 v1(452,1464) ; v1(1147,305) 1917,305 v1(1991,231) 2141,231 v1(2204,168)
  Bottom w12: v1(372,1516) 392,1536 408,1536 Q1.2 ; 377.4,1323.78 478,1223.04 478,522 640,360 1048,360 1103,305 v1(1147,305) ; v1(452,1464) 480,1464 692,1252 712,1252 D2.C ; S13.2 1884,156 1940,156 1991,207 v1(1991,231) ; v1(2204,168) 2716,168 2972,424 2988,424 2999,435 2999,750 3043,794 3122,794 3268,648 3268,624 PAM84031.6 PAM84031.5 PAM84031.4 3372,628 3372,864 PAM84031.13 3372,868 3372,960 ; C26.2 3212,960 3300,960 C25.2 3304,960 3372,960 ; C14.2 3584,960 3496,960 C15.2 3488,960 3400,960 C16.2 3396,960 3372,960
  Bottom w14: U2.1 338.59,1400 377.4,1400 ; v1(376,1432) 377.4,1430.6 377.4,1400 ; 377.4,1323.78 377.4,1400
pads on no net: ?.1 ?.2 ?.3 ?.4 ?.ANCHOR1 ?.ANCHOR2 A1.17 A1.18 A1.19 A1.20 A1.21 A1.22 A1.27 A1.28 A1.32 H1.P$1 H2.P$1 H3.P$1 H4.P$1 J1.1 J1.2 J1.8 J1.CD J2.NC1 J2.NC2 J3.ID J4.NC1 J4.NC2 J5.TSH LCD1.P$7 LCD1.P$15 LCD1.P$16 LCD1.P$17 LCD1.P$18 PAM84031.9 PAM84031.10 PAM84031.14 PAM84031.16 S13.3 S13.GND1 S13.GND2 S13.GND3 S13.GND4 U4.9 U4.10 U4.11 U4.12 U4.15 Y1.2 Y1.4

## Polygon pours and split planes (outlines as drawn)
GND on Bottom "Polygon_2_Net_GND" (solid, remove dead copper, pour order 1): -203,2153 4153,2153 4153,-193 -203,-193
GND on Top "Polygon_1_Net_GND" (solid, remove dead copper, pour order 0): -103,2053 4053,2053 4053,-103 -103,-103

## Keep-outs
Keep-Out Layer:
  the board outline again, w10

## Silkscreen, mask and mechanical layers (free items; w line width, h text height)
Top Overlay:
  text "L" at 440,1860 h59.5
  text "R" at 3480,1855 h59.5
  text "Up" at 380,1655 h59.5
  text "Right" at 550,1450 h59.5
  text "A" at 3465,1315 h59.5
  text "B" at 3760,1310 h59.5
  text "Left" at 105,1100 h59.5
  text "Down" at 325,895 h59.5
  text "Select" at 70,745 h59.5
  text "Start" at 510,745 h59.5
  text "Menu" at 3395,695 h59.5
  text "Mr. Swampert" at 3790,275 h48.45 r90
  text "ArcadESP" at 275,90 h73.1
Bottom Overlay:
  text "ESPlay Rev. A" at 3150,1860 h34
  text "Designed by Yatsu" at 3150,1800 h34
Dimension:
  lines w10: 0,118.11 ccw(c118.11,118.11) 118.11,0 3818.9,0 3829.19,0.45 ccw(c3818.91,118.12) 3936.58,107.81 3937.01,115.79 3937.01,1852.72 3936.46,1862.91 ccw(c3820.06,1851.56) 3818.9,1968.5 118.11,1968.5 107.82,1968.06 ccw(c118.12,1850.39) 0,1850.39 0,118.11 ; 1249.1,183.35 cw(c1250.2,166.62) 1253.47,150.17 1251.3,149.88 cw(c1250.2,166.62) 1249.1,183.35 ; 1398.7,183.35 cw(c1399.8,166.62) 1403.07,150.17 1400.9,149.88 cw(c1399.8,166.62) 1398.7,183.35 ; 1833.23,83.84 cw(c1850.93,84.98) 1833.53,81.54 1833.23,83.84 ; 1951.34,83.84 cw(c1969.04,84.98) 1951.64,81.54 1951.34,83.84 ; 3156.82,70.2 cw(c3158.15,46.58) 3162.11,23.25 3159.48,22.95 cw(c3158.15,46.58) 3156.82,70.2 ; 3156.82,168.62 cw(c3158.15,145) 3162.11,121.67 3159.48,121.38 cw(c3158.15,145) 3156.82,168.62 ; 3353.67,365.47 cw(c3355,341.85) 3358.96,318.53 3356.33,318.23 cw(c3355,341.85) 3353.67,365.47 ; 3550.52,70.2 cw(c3551.85,46.58) 3555.82,23.25 3553.18,22.95 cw(c3551.85,46.58) 3550.52,70.2 ; 3550.52,168.62 cw(c3551.85,145) 3555.82,121.67 3553.18,121.38 cw(c3551.85,145) 3550.52,168.62
tPlace:
  lines w6: 2490,0 2490,150 2700,150 ; 2700,0 2700,150 ; 2750,100 2700,150
  text "I2C Port" at 2760,75 h34
  text "On" at 1839.68,32.81 h27.2
  text "Off" at 1931.09,32.81 h27.2
  text "SCL" at 2545,25 h34 r90
  text "SDA" at 2590,25 h34 r90
  text "3V3" at 2640,25 h34 r90
  text "GND" at 2685,25 h34 r90
bPlace:
  text "+3.3V" at 690,1525 h27.2
  text "Reset" at 2770,1290 h34
  text "+VBATT" at 190,1275 h27.2
  text "GND" at 1125,295 h27.2
  text "+VUSB" at 1845,210 h27.2

## Text inside footprints (layer, text, board x,y; h text height)
J3: tDocu "PCB Front" at 1559.65,-103.46 h10.2 r270
LCD1: tPlace "18" at 2638.66,1368.7 h42.5 r180; tPlace "1" at 2638.66,704.92 h42.5 r180
U$2: tPlace "/home/pebri/Pictures/usb_logo.bmp" at 1350,81 h0.34 r180
U$3: tPlace "/home/pebri/Pictures/headphone.bmp" at 3635,59 h0.34